# Altium PCB PCB_Rapsi_Hat_V2.PcbDoc
Units mm, origin at the board's own origin, x right, y up, seen from the top; angles counter-clockwise.
Board outline 54 x 54 mm, 2 copper layers (Top Layer, Bottom Layer), stack 1.57 mm thick; 26 components, 23 nets, 124 pads, 6 vias.
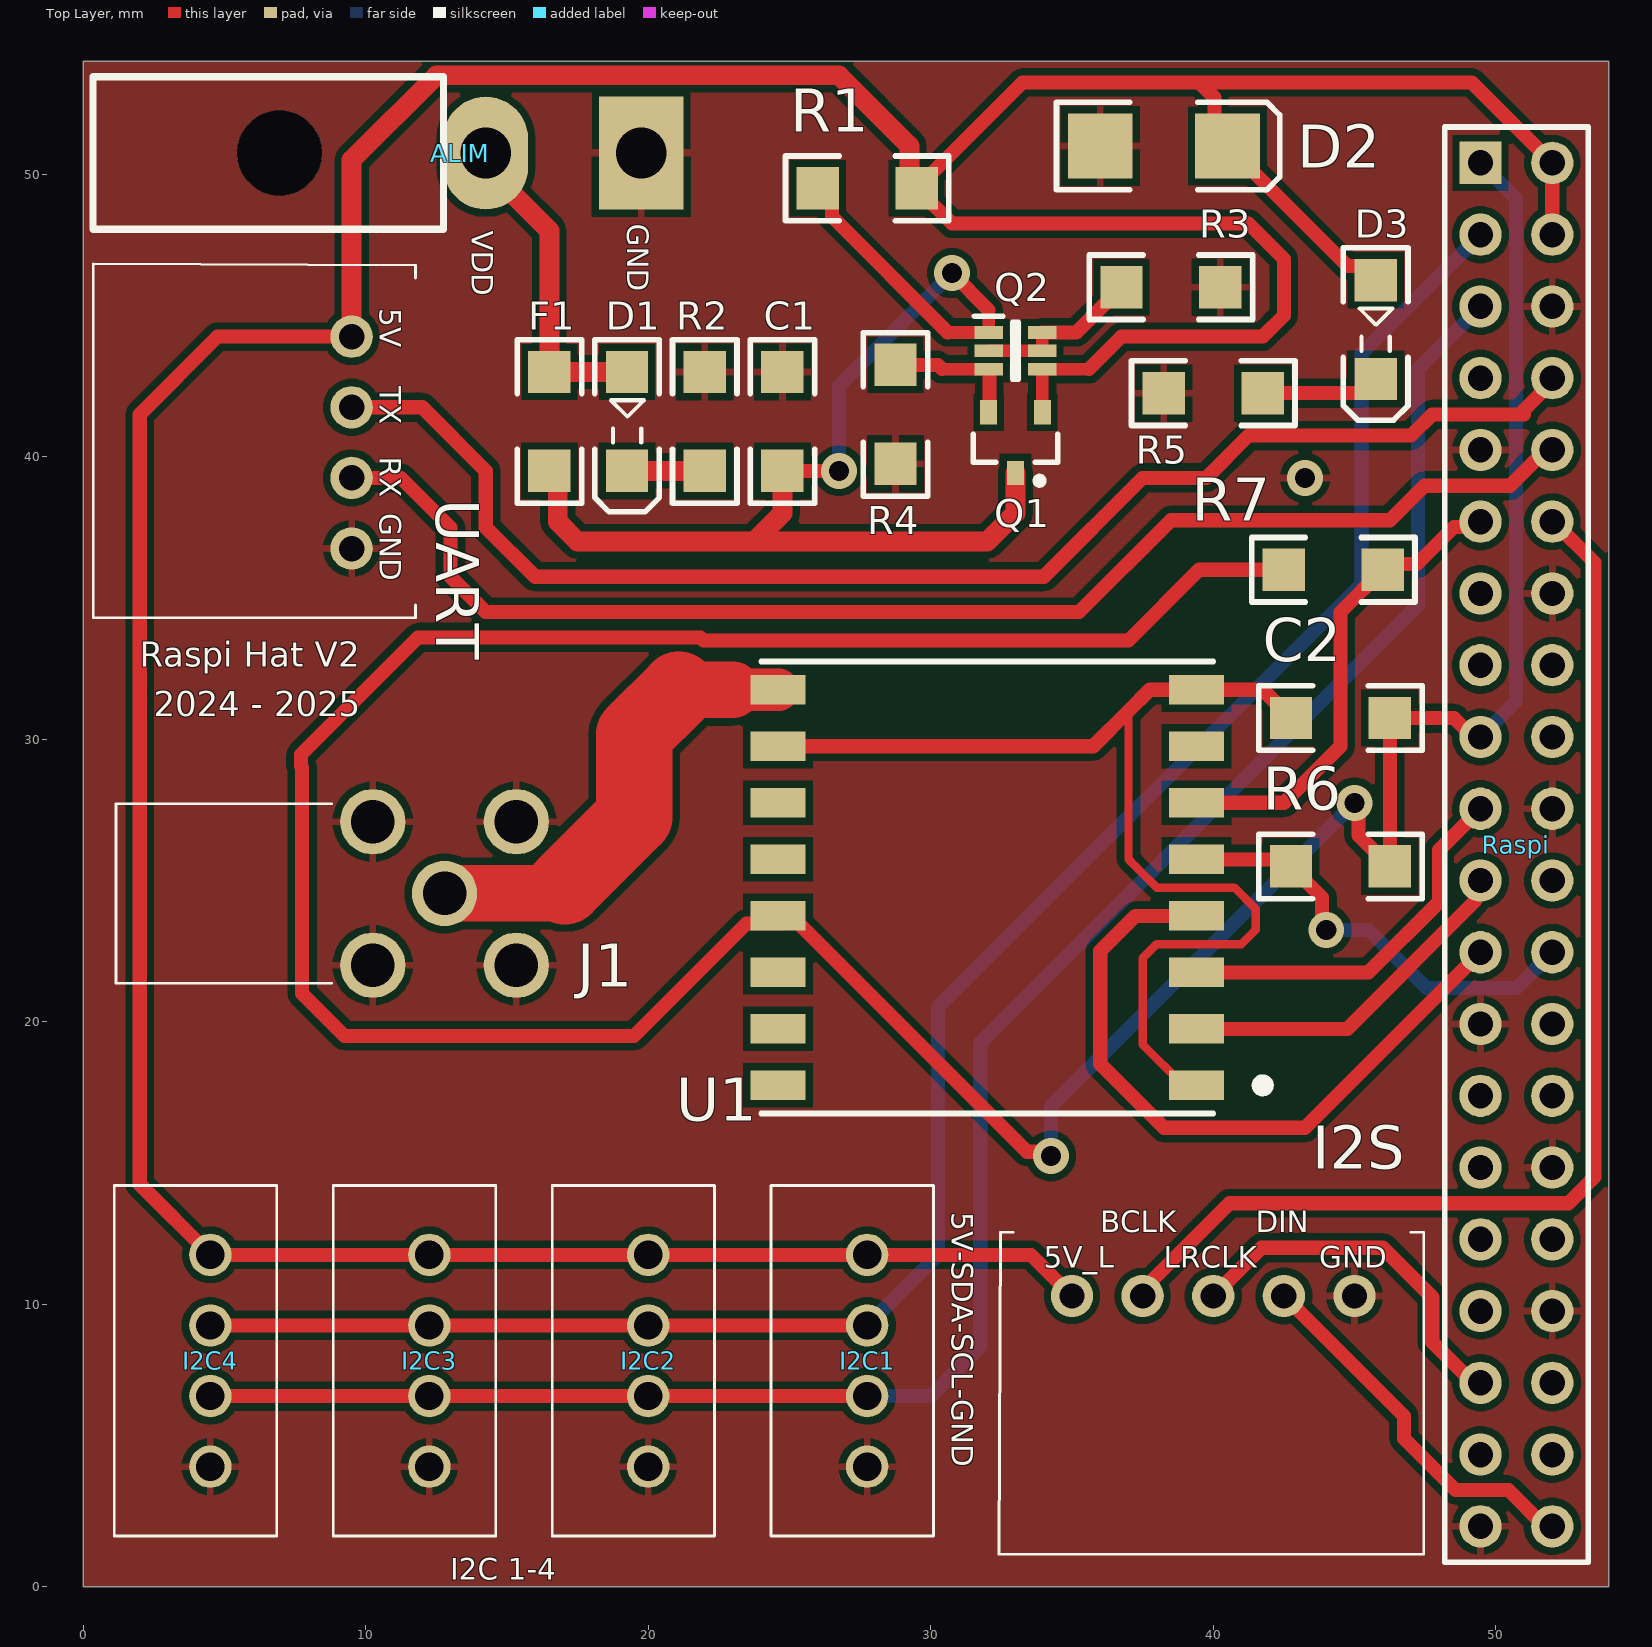
[diagram p0: Top Layer view]
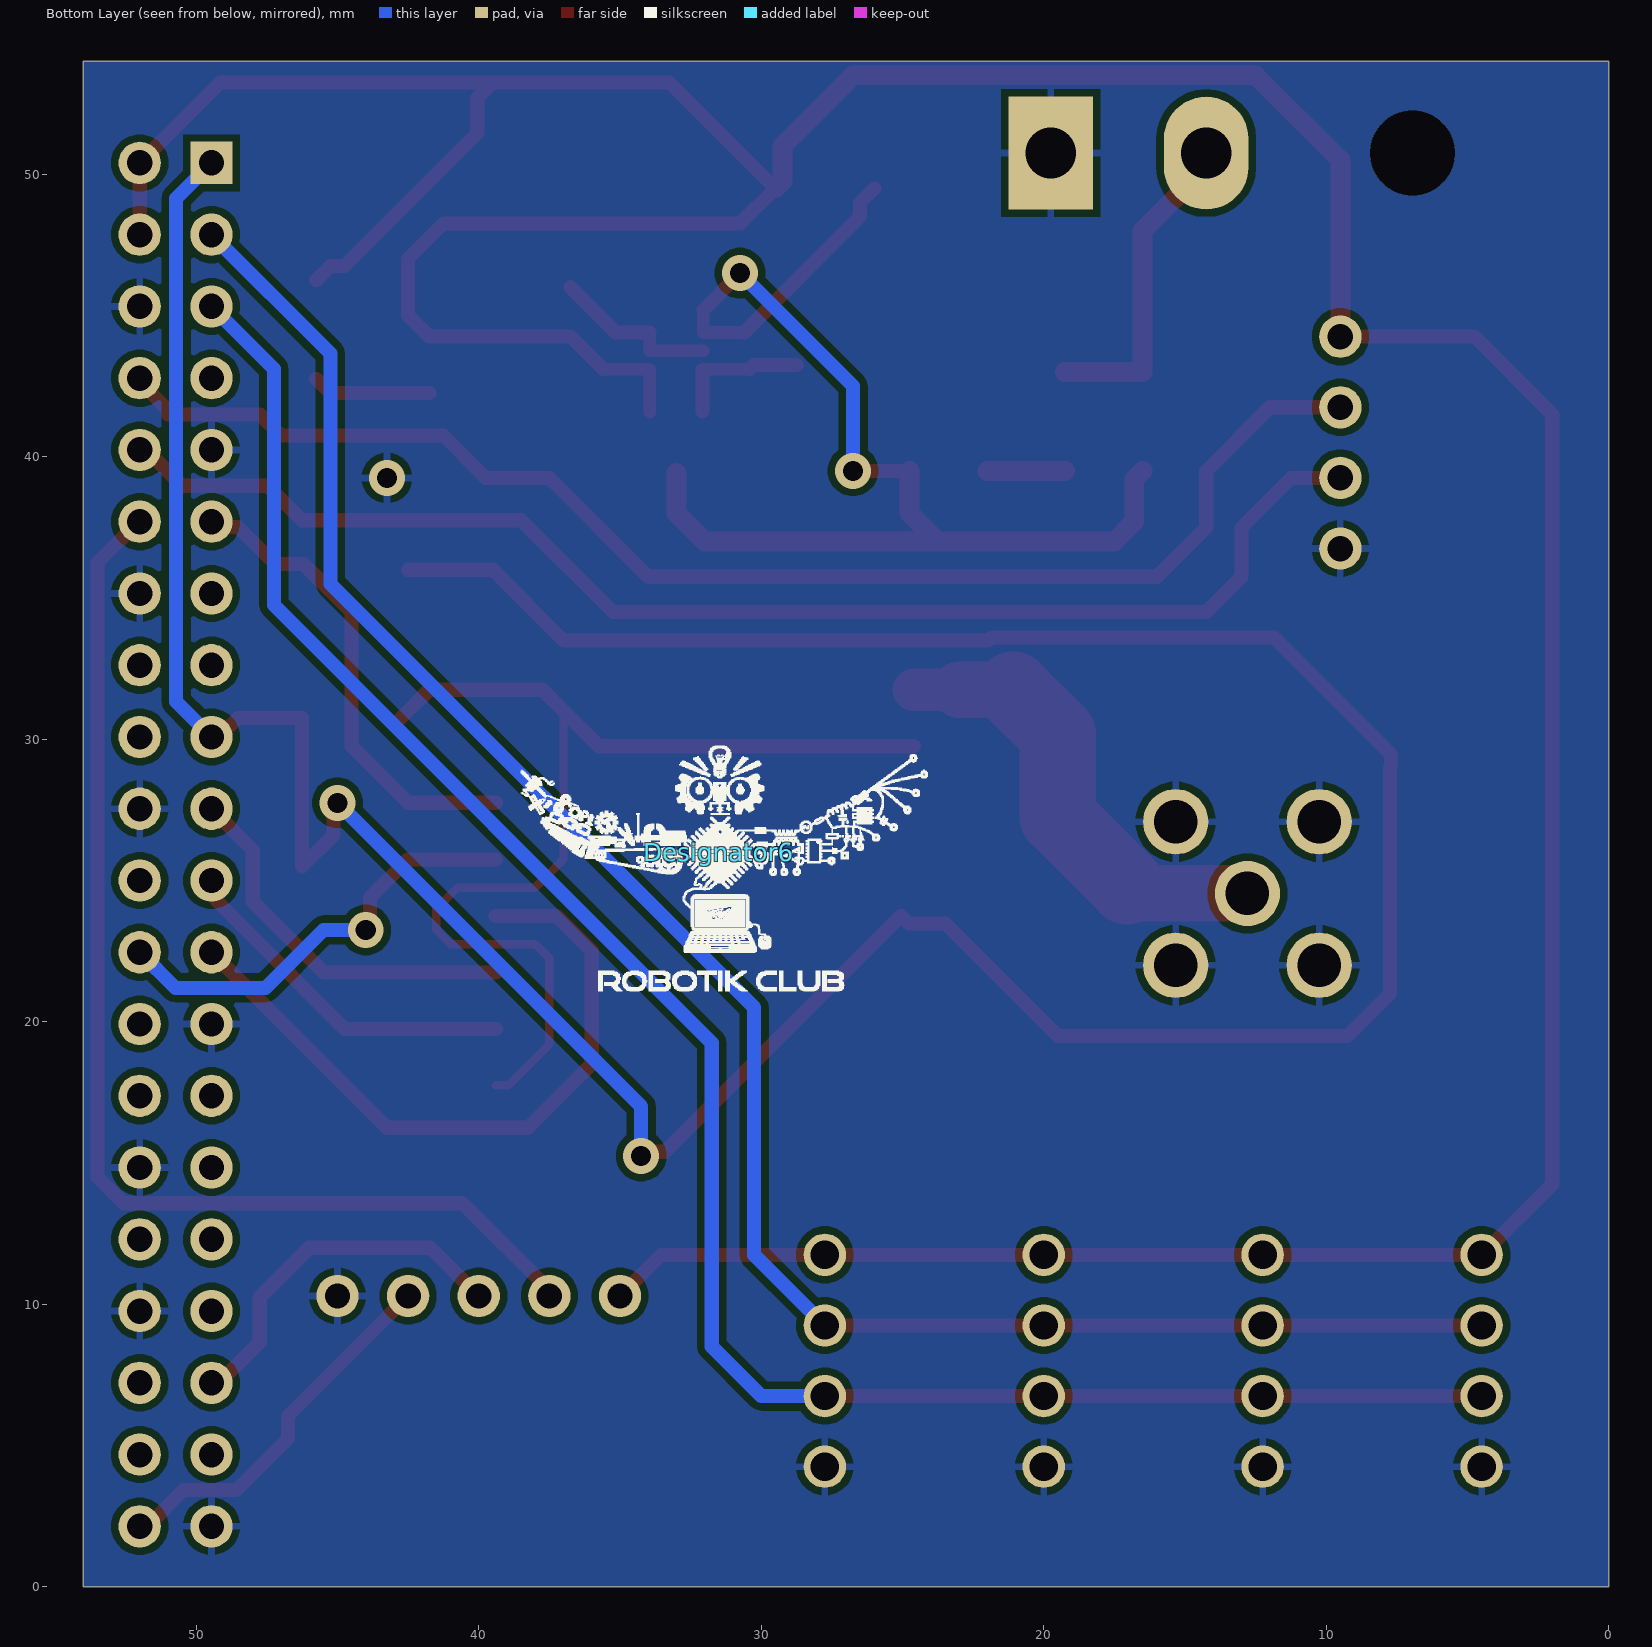
[diagram p1: Bottom Layer view, seen from below]
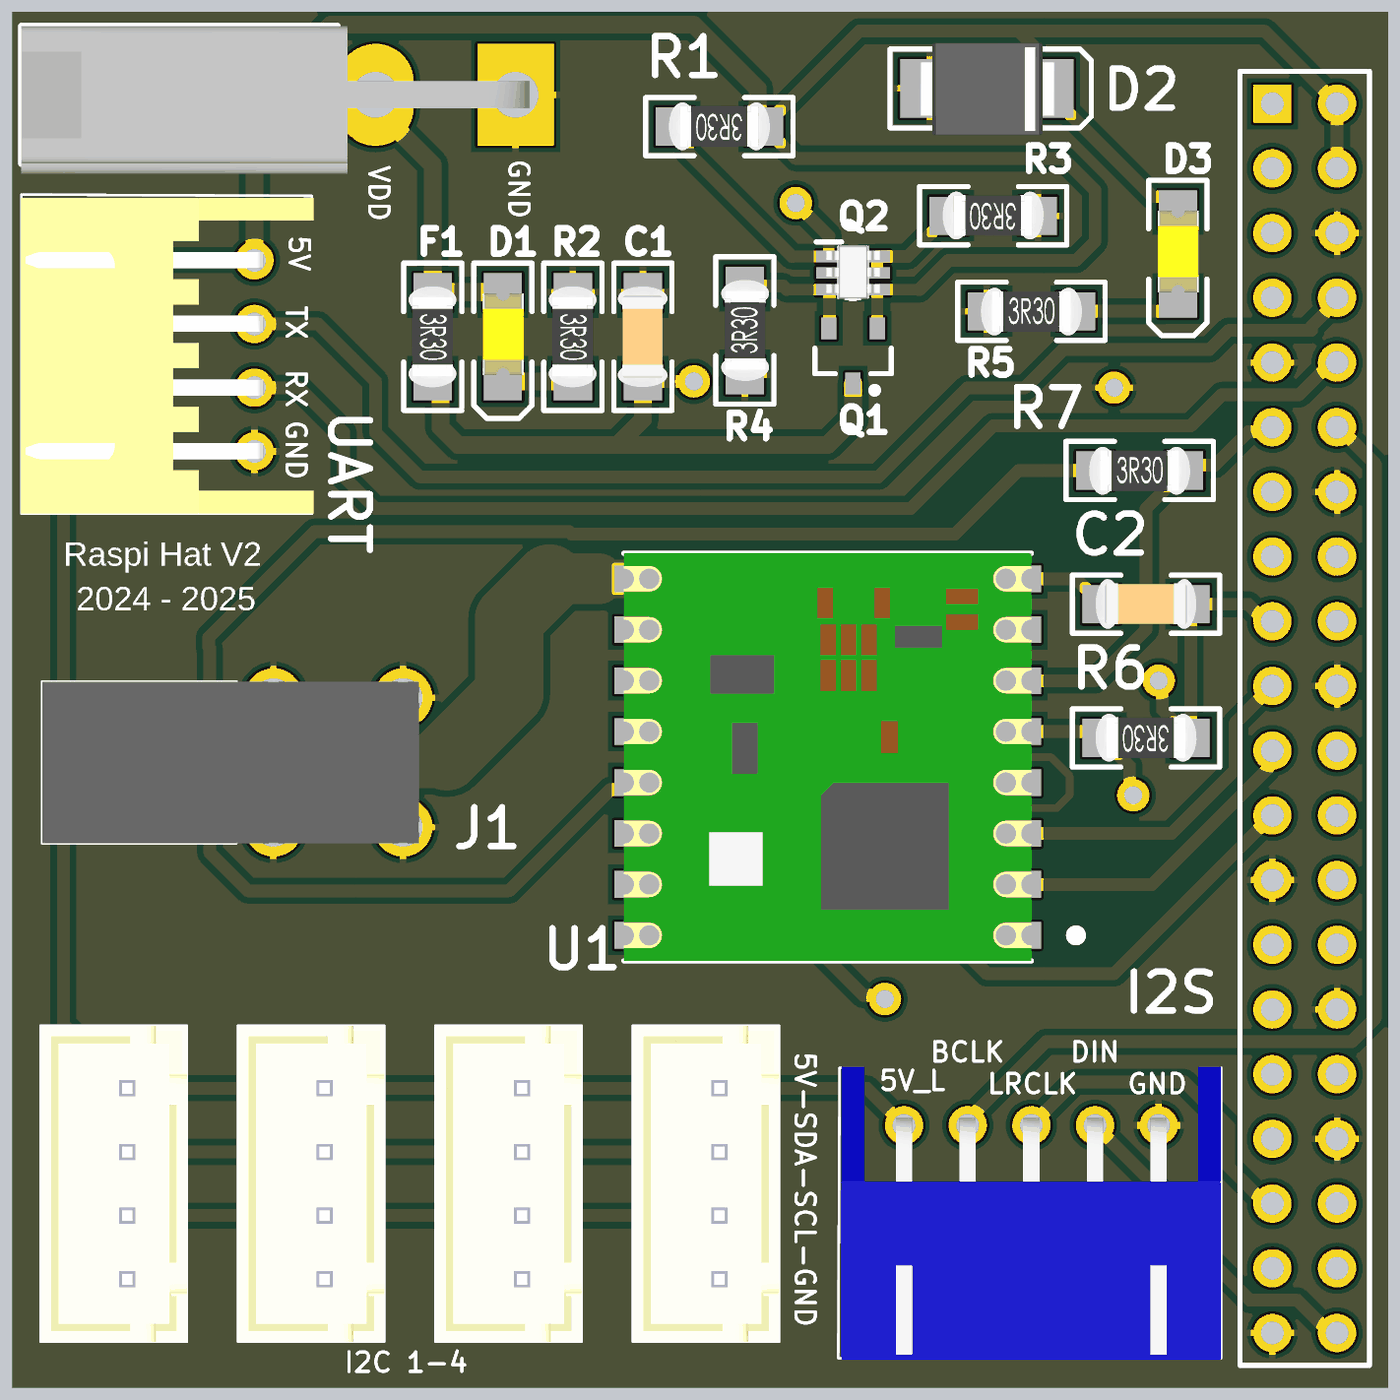
[diagram p2: 3D render of the assembled board from above, using the file's embedded part models]

## Layer stack, top to bottom
Top Solder: solder mask 0.01, Solder Resist, Dk 3.5
Top Layer: signal copper 0.035
Dielectric 1: dielectric 1.5, FR-4, Dk 4.8
Bottom Layer: signal copper 0.035
Bottom Solder: solder mask 0.01, Solder Resist, Dk 3.5

## Board outline
0,0 54,0 54,54 0,54

## Design rules (kind name [scope] priority, off if disabled: settings)
Clearance [All] p1: gap=0.254 ignorepadtopadclearanceinfootprint=FALSE except(0: Arc-Hole Track-Hole SMDPad-Hole THPad-Hole Via-Hole Fill-Hole Poly-Hole Region-Hole Text-Hole)
PlaneClearance [All] p1: clearance=0.258
PolygonConnect [All] p1: connectstyle=Relief reliefconductorwidth=0.254 reliefentries=4 polygonreliefangle="90 Angle" airgapwidth=0.254
RoutingVias [All] p1: holewidth=0.711 width=1.27 viastyle="Through Hole" minholewidth=0.356 minwidth=0.635 maxholewidth=0.711 maxwidth=1.27
SolderMaskExpansion [All] p1: expansion=0.102 istentingtop=FALSE
SupplyNets "Schematic Supply Nets_4" [InNet('5V_IN')] p1: voltage=0.000
SupplyNets "Schematic Supply Nets_3" [InNet('GND')] p2: voltage=0.000
SupplyNets "Schematic Supply Nets_2" [InNet('3V3_L')] p3: voltage=0.000
SupplyNets "Schematic Supply Nets_1" [InNet('5V_L')] p4: voltage=0.000
Width [All] p1: maxlimit=2.8 minlimit=0.254 preferedwidth=0.5 minimp=50.000000 maximp=50.000000 favimp=50.000000
29 further rules are at their usual default settings.

## Components (designator, comment, footprint, x,y, rotation, side; value= is the part's Value field where it differs from the comment)
ALIM "Header 2H" Molex_MiniFitJr_2x1H 14.25,50.75 r180 top
C1 "Cap" "Capacitor 1206" 24.75,41.25 r270 top value=100pF
C2 "Cap" "Capacitor 1206" 44.5,30.75 r180 top value=10µF
D1 "5V_IN" KP-3216SEC 19.25,41.25 r270 top
D2 "SMBJ5.0A" SMB 38.25,51 r90 top
D3 "5V_L" KP-3216SEC 45.75,44.5 r270 top
Designator6 "Comment" Logo_lowres 31.5,26 r180 bottom
F1 "3A" "Resistor 1206" 16.5,41.25 r270 top
I2C1 "Header 4V" B4BXHALFSN 27.75,4.25 r90 top
I2C2 "Header 4V" B4BXHALFSN 20,4.25 r90 top
I2C3 "Header 4V" B4BXHALFSN 12.25,4.25 r90 top
I2C4 "Header 4V" B4BXHALFSN 4.5,4.25 r90 top
I2S "Header 5H" S5B-XH-A 45,10.293 r180 top
J1 "0731000114" 0731000114 12.79,24.54 r0 top
Q1 "DMG2305UX" SOT23_L 33,40.5 r270 top
Q2 "BCM857BS" SOT65P210X110-6N 33,43.75 r0 top
R1 "Res2" "Resistor 1206" 27.75,49.5 r180 top value=0
R2 "Res2" "Resistor 1206" 22,41.25 r270 top value=300
R3 "Res2" "Resistor 1206" 38.5,46 r180 top value=10K
R4 "Res2" "Resistor 1206" 28.75,41.5 r90 top value=47K
R5 "Res2" "Resistor 1206" 40,42.25 r0 top value=300
R6 "Res2" "Resistor 1206" 44.5,25.5 r180 top value=10K
R7 "Res2" "Resistor 1206" 44.25,36 r0 top value=10K
Raspi "Header 20X2" HDR2X20 49.46,50.4 r270 top
U1 "RFM95W-868S2" XCVR_RFM95W-868S2 32,24.75 r180 top
UART "Header 4H" S4B-XH-A 9.5,36.75 r90 top

## Footprints (in the part's own frame and the unit in brackets; to place one, negate y for a bottom-side part, rotate by r counter-clockwise, add the part's x,y. Pads: shape width x height; smd on the part's side, far side on the other; paste and mask are expansions set on the pad)
0731000114 [mm]
  round 2.31 hole 1.54: 1(0,0) 2(2.54,2.54) 3(-2.54,2.54) 4(-2.54,-2.54) 5(2.54,-2.54)
  silkscreen extent -11.63,-3.17 -4,3.17, body extent -11.63,-3.21 3.21,3.21, height 9.67
B4BXHALFSN [mm]
  round 1.5 hole 1: 1(0,0) 2(2.5,0) 3(5,0) 4(7.5,0)
  silkscreen extent -2.45,-2.35 9.95,3.4, body extent -2.45,-2.35 9.95,3.4, height 7.52
"Capacitor 1206" [mm]
  rect 1.5x1.5 smd: 1(-1.75,0) 2(1.75,0)
  silkscreen extent -2.89,-1.14 2.89,1.14, body extent -1.98,-0.99 1.98,0.96, height 1.3
HDR2X20 [mm] "Connector; Header; 20x2 Position"
  rect 1.5x1.5 hole 0.9: 1(0,0)
  round 1.5 hole 0.9: 2(0,2.54) 3(2.54,0) 4(2.54,2.54) 5(5.08,0) 6(5.08,2.54) 7(7.62,0) 8(7.62,2.54) 9(10.16,0) 10(10.16,2.54) 11(12.7,0) 12(12.7,2.54) 13(15.24,0) 14(15.24,2.54) 15(17.78,0) 16(17.78,2.54) 17(20.32,0) 18(20.32,2.54) 19(22.86,0) 20(22.86,2.54) 21(25.4,0) 22(25.4,2.54) 23(27.94,0) 24(27.94,2.54) 25(30.48,0) 26(30.48,2.54) 27(33.02,0) 28(33.02,2.54) 29(35.56,0) 30(35.56,2.54) 31(38.1,0) 32(38.1,2.54) 33(40.64,0) 34(40.64,2.54) 35(43.18,0) 36(43.18,2.54) 37(45.72,0) 38(45.72,2.54) 39(48.26,0) 40(48.26,2.54)
  silkscreen extent -1.27,-1.27 49.53,3.81
KP-3216SEC [mm]
  rect 1.5x1.5 smd: 1(-1.75,0) 2(1.75,0)
  silkscreen extent -2.89,-1.14 3.2,1.14, body extent -1.7,-0.79 1.5,0.81, height 1.1
Logo_lowres [mm]
  silkscreen extent -7.01,-4.93 7.39,3.76
Molex_MiniFitJr_2x1H [mm] "Connecteur Molex 2"
  rect 3x4 hole 1.8: 1(-5.5,0)
  oval 3x4 hole 1.8: 2(0,0)
  round 3 hole 3 unplated: 3(7.3,0)
  silkscreen extent 1.5,-2.7 13.9,2.7, body extent -6.03,-2.7 13.9,3.1, height 11.01
"Resistor 1206" [mm]
  rect 1.5x1.5 smd: 1(-1.75,0) 2(1.75,0)
  silkscreen extent -2.89,-1.14 2.89,1.14, body extent -1.98,-0.95 1.98,0.93, height 0.55
S4B-XH-A [mm]
  round 1.5 hole 0.9: 1(0,0) 2(2.5,0) 3(5,0) 4(7.5,0)
  silkscreen extent -2.45,-2.26 10.08,9.14, body extent -2.44,-2.32 9.96,9.18, height 6.15
S5B-XH-A [mm]
  round 1.5 hole 0.9: 1(0,0) 2(2.5,0) 3(5,0) 4(7.5,0) 5(10,0)
  silkscreen extent -2.45,-2.26 12.58,9.14, body extent -2.45,-2.3 12.45,9.2, height 6.15
SMB [mm] "SMB Didoe"
  rect 2.3x2.3 smd: 1(0,2.25) 2(0,-2.25)
  silkscreen extent -1.55,-4.1 1.55,3.8, body extent -1.84,-2.67 1.78,2.62, height 2.2
SOT23_L [mm] "SOT23, 3-Leads, Body 2.9x1.3mm, Pitch 0.95mm, Lead Span 2.3mm - Reverse Pinning, IPC High Density"
  rect 0.85x0.6 smd: 1(1.075,0) 2(-1.075,-0.95) 3(-1.075,0.95)
  silkscreen extent -0.3,-1.5 1.47,1.5, body extent -0.7,-1.5 0.7,1.5, height 1.1
SOT65P210X110-6N [mm]
  rect 1x0.45 smd: 1(-0.95,0.65) 2(-0.95,0) 3(-0.95,-0.65) 4(0.95,-0.65) 5(0.95,0) 6(0.95,0.65)
  silkscreen extent -1.45,-1 0.1,1.22, body extent -1.05,-1.06 1.05,1.09, height 0.95
XCVR_RFM95W-868S2 [mm]
  rect 1.95x1.05 smd: 1(-7.4,7) 2(-7.4,5) 3(-7.4,3) 4(-7.4,1) 5(-7.4,-1) 6(-7.4,-3) 7(-7.4,-5) 8(-7.4,-7) 9(7.4,-7) 10(7.4,-5) 11(7.4,-3) 12(7.4,-1) 13(7.4,1) 14(7.4,3) 15(7.4,5) 16(7.4,7)
  silkscreen extent -10.04,-8 8,8, body extent -8,-8 8,8, height 1.8

## Part data
ALIM: "Header, 2-Pin, Right Angle", LatestRevisionDate=17-Jul-2002, LatestRevisionNote="Re-released for DXP Platform.", Publisher="Altium Limited"
C1 C2: "Capacitor", LatestRevisionDate=17-Jul-2002, LatestRevisionNote="Re-released for DXP Platform.", PackageDescription="Radial Cap, Thru-Hole; 2 Leads; 0.3 in Pin Spacing", PackageReference=RAD-0.3, Published=8-Jun-2000, Publisher="Altium Limited"
D1 D3: library part LED2, "Typical RED, GREEN, YELLOW, AMBER GaAs LED", LatestRevisionDate=17-Jul-2002, LatestRevisionNote="Re-released for DXP Platform.", PackageDescription="SM LED; 2 Flat Leads", PackageReference=3.2X1.6X1.1, PackageVersion=Feb-2002, Published=8-Jun-2000, Publisher="Altium Limited"
D2: library part "D Zener", "Zener Diode", LatestRevisionDate=17-Jul-2002, LatestRevisionNote="Re-released for DXP Platform.", PackageDescription="Diode, Thru-Hole; 2 Leads; 0.7 in Pin Spacing", PackageReference=DIODE-0.7, Published=8-Jun-2000, Publisher="Altium Limited"
F1: library part "Fuse 2", "Fuse", LatestRevisionDate=17-Jul-2002, LatestRevisionNote="Re-released for DXP Platform.", PackageDescription="Thru-Hole; 2 Leads", PackageReference=PIN-W2/E2.8, Published=8-Jun-2000, Publisher="Altium Limited"
I2C1 I2C2 I2C3 I2C4: library part "Header 4H", "Header, 4-Pin, Right Angle", LatestRevisionDate=17-Jul-2002, LatestRevisionNote="Re-released for DXP Platform.", Publisher="Altium Limited"
I2S: "Header, 5-Pin, Right Angle", LatestRevisionDate=17-Jul-2002, LatestRevisionNote="Re-released for DXP Platform.", Publisher="Altium Limited"
J1: "Connector", Manufacturer_Name=Molex, Mouser Part Number=N/A, Arrow Part Number=0731000114, Arrow Price/Stock=https://www.arrow.com/en/products/0731000114/molex?region=europe, Datasheet Link=https://www.molex.com/pdm_docs/sd/731000114_sd.pdf, Height=9.57mm, Manufacturer_Part_Number=0731000114, Mouser Price/Stock=https://www.mouser.co.uk/ProductDetail/Molex/0731000114?qs=PBcRNPEHKspjQWXqYv3LPw%3D%3D
Q1: library part MOSFET-P, "P-Channel MOSFET", LatestRevisionDate=17-Jul-2002, LatestRevisionNote="Re-released for DXP Platform.", PackageDescription="TO, Flat Index; 3 In-Line, Axial Leads; Body Dia. 4.6mm; Lead Dia. 0.5 mm (max)", PackageReference=E3, PackageVersion=1995/1996, Published=8-Jun-2000, Publisher="Altium Limited"
Q2: "Transistor", Manufacturer_Name=Nexperia, Mouser Part Number=N/A, Datasheet Link=https://assets.nexperia.com/documents/data-sheet/BCM857BV_BS_DS.pdf, Height=1.1mm, Manufacturer_Part_Number=BCM857BS, Mouser Price/Stock=https://www.mouser.com/Search/Refine.aspx?Keyword=N%2FA
R1 R2 R3 R4 R5 R6 R7: "Resistor", LatestRevisionDate=17-Jul-2002, LatestRevisionNote="Re-released for DXP Platform.", PackageDescription="Axial Device, Thru-Hole; 2 Leads; 0.4 in Pin Spacing", PackageReference=AXIAL-0.4, Published=8-Jun-2000, Publisher="Altium Limited"
Raspi: "Header, 20-Pin, Dual row", LatestRevisionDate=17-Jul-2002, LatestRevisionNote="Re-released for DXP Platform.", Publisher="Altium Limited"
U1: "General ISM < 1GHz LoRaâ„¢ Transceiver Module 868MHz Antenna Not Included Surface Mount", Package="Non Standard RF Solutions", Availability="In Stock", Check_prices=https://www.snapeda.com/parts/RFM95W-868S2/RF+Solutions/view-part/?ref=eda, MF=RF, MP=RFM95W-868S2, Price=None, Purchase-URL=https://pricing.snapeda.com/search?q=RFM95W-868S2&ref=eda, SnapEDA_Link=https://www.snapeda.com/parts/RFM95W-868S2/RF+Solutions/view-part/?ref=snap
UART: "Header, 4-Pin, Right Angle", LatestRevisionDate=17-Jul-2002, LatestRevisionNote="Re-released for DXP Platform.", Publisher="Altium Limited"

## Via types
v1: diameter 1.27, hole 0.711, Top Layer to Bottom Layer, 6 vias

## Nets (pads, with @x,y where several pads share a name; then routed paths per layer and width w, separated by ;. In a path a pad name is that pad's centre, name@x,y a point inside that pad or via, vN(x,y) a via of type N, cw(c..) or ccw(c..) an arc to the next point about the centre after c; other vN are vias at no path point)
3V3_L: C2.1 R6.1 R7.1 Raspi.1 Raspi.17 U1.13 | length 128.3
  Top Layer w0.5: v1(34.25,15.25) 34.103,15.397 33.403,15.397 25.05,23.75 24.775,23.475 23.475,23.475 19.5,19.5 9.25,19.5 7.75,21 7.75,29 7.707,29.043 7.707,29.457 11.854,33.604 21.85,33.604 21.954,33.5 37,33.5 39.5,36 R7.1 ; v1(45,27.75) 45.147,27.603 45.147,26.603 R6.1 C2.1 48.519,30.75 49.189,30.08 Raspi.17
  Bottom Layer w0.5: v1(34.25,15.25) 34.25,17 v1(45,27.75) ; Raspi.17 50.714,31.334 50.714,49.146 Raspi.1
5V_IN: ALIM.2 D1.1 F1.1 | length 11.4
  Top Layer w0.7: ALIM.2 14.25,50.25 16.5,48 F1.1 D1.1
5V_L: D2.2 D3.1 I2C1.4 I2C2.4 I2C3.4 I2C4.4 I2S.5 Q1.3 Q2.4 R1.1 Raspi.2 Raspi.4 UART.4 | length 165
  Top Layer w0.45: Q1.3 Q2.4 35.6,43.1
  Top Layer w0.5: UART.4 4.75,44.25 2,41.5 2,14.25 I2C4.4 I2C3.4 I2C2.4 I2C1.4 33.543,11.75 I2S.5 ; 35.6,43.1 36.75,44.25 41.75,44.25 42.5,45 42.5,47 41.25,48.25 30.75,48.25 R1.1 33.25,53.25 39.5,53.25 ; D3.1 45.25,46.75 44.75,46.75 D2.2 40.043,51.457 40.043,52.707 39.5,53.25 ; Raspi.4 Raspi.2 49.15,53.25 39.5,53.25
  Top Layer w0.7: UART.4 9.5,50.5 12.5,53.5 26.75,53.5 29.25,51 29.25,49.75 R1.1
GND: ALIM.1 C1.1 D2.1 I2C1.1 I2C2.1 I2C3.1 I2C4.1 I2S.1 J1.2 J1.3 J1.4 J1.5 R2.1 R3.1 R4.1 R5.1 Raspi.6 Raspi.9 Raspi.14 Raspi.20 Raspi.25 Raspi.30 Raspi.34 Raspi.39 UART.1
  other v1: 43.25,39.25
NetC1_2: C1.2 F1.2 Q1.1 Q2.1 R1.2 | length 44.9
  Top Layer w0.45: 30.6,44.4 Q2.1 32.05,45.2
  Top Layer w0.5: C1.2 v1(26.75,39.5) ; R1.2 26.5,49 26.5,48.5 30.6,44.4 ; v1(30.75,46.5) 32.05,45.2
  Top Layer w0.7: F1.2 16.8,39.2 16.8,37.7 17.5,37 23.75,37 ; C1.2 24.75,38 23.75,37 ; Q1.1 33,38 32,37 23.75,37
  Bottom Layer w0.5: v1(26.75,39.5) 26.75,42.5 v1(30.75,46.5)
NetC2_2: C2.2 U1.1 U1.8 U1.10 | length 40.6
  Top Layer w0.3: 37,31 37,25.75 37.25,25.5 38,24.75 40.75,24.75 41.5,24 41.5,23.25 41,22.75 38,22.75 37.5,22.25 37.5,19.2 38.95,17.75 U1.1
  Top Layer w0.5: U1.10 35.75,29.75 37,31 37.75,31.75 U1.8 41.75,31.75 C2.2
NetD1_2: D1.2 R2.2 | length 2.7
  Top Layer w0.7: D1.2 R2.2
NetD3_2: D3.2 R5.2 | length 4.2
  Top Layer w0.5: R5.2 45.25,42.25 D3.2
NetJ1_1: J1.1 U1.9 | length 16.4
  Top Layer w1.5: 23,31.75 U1.9
  Top Layer w2: J1.1 17,24.54 ; 21.082,31.75 23,31.75
  Top Layer w2.7: 17.04,24.79 19.5,27.25 19.5,30.168 21.082,31.75
NetQ1_2: Q1.2 Q2.3 R4.2 | length 4.8
  Top Layer w0.45: 30.4,43.1 Q2.3
  Top Layer w0.5: R4.2 30.25,43.25 30.4,43.1 ; Q1.2@32.075,41.6 Q2.3@32.075,43.075
NetQ2_2: Q2.2 Q2.5 Q2.6 R3.2 | length 6
  Top Layer w0.45: Q2.2 Q2.5 Q2.6
  Top Layer w0.5: Q2.6 35.15,44.4 R3.2
SPI0_CE0: R6.2 Raspi.24 U1.5 | length 15.6
  Top Layer w0.5: U1.5 42.5,25.75 R6.2 43.853,24.397 43.853,23.397 v1(44,23.25)
  Bottom Layer w0.5: v1(44,23.25) 45.5,23.25 47.55,21.2 50.74,21.2 Raspi.24
SPI0_MISO: Raspi.21 U1.2 | length 12.6
  Top Layer w0.5: U1.2 44.75,19.75 49.269,24.269 49.269,24.809 Raspi.21
SPI0_MOSI: Raspi.19 U1.3 | length 13.5
  Top Layer w0.5: U1.3 45.5,21.75 48,24.25 48,26.08 Raspi.19
SPI0_SCLK: Raspi.23 U1.4 | length 24.9
  Top Layer w0.5: U1.4 37.25,23.75 36,22.5 36,18.5 38.25,16.25 43.25,16.25 Raspi.23
T_GPIO_17: R7.2 Raspi.11 U1.6 | length 17
  Top Layer w0.5: U1.6 42.5,27.75 44.5,29.75 44.5,34.5 R7.2 46.207,36.207 47.207,36.207 48.519,37.519 49.279,37.519 Raspi.11
T_GPIO_18: I2S.4 Raspi.12 | length 41.7
  Top Layer w0.5: I2S.4 37.5,10.5 40.575,13.575 52.575,13.575 53.5,14.5 53.5,36.25 52.05,37.7 Raspi.12
T_GPIO_19: I2S.3 Raspi.35 | length 13.1
  Top Layer w0.5: I2S.3 41.707,12 46,12 47.75,10.25 47.75,8.659 49.189,7.22 Raspi.35
T_GPIO_21: I2S.2 Raspi.40 | length 13.3
  Top Layer w0.5: I2S.2 46.75,6.043 46.75,5.25 48.575,3.425 50.444,3.425 51.729,2.14 Raspi.40
T_I2C_SCL: I2C1.2 I2C2.2 I2C3.2 I2C4.2 Raspi.5 | length 72.1
  Top Layer w0.5: I2C4.2 I2C3.2 I2C2.2 I2C1.2
  Bottom Layer w0.5: I2C1.2 30,6.75 31.75,8.5 31.75,19.25 47.25,34.75 47.25,43.11 Raspi.5
T_I2C_SDA: I2C1.3 I2C2.3 I2C3.3 I2C4.3 Raspi.3 | length 70.9
  Top Layer w0.5: I2C4.3 I2C3.3 I2C2.3 I2C1.3
  Bottom Layer w0.5: I2C1.3 30.25,11.75 30.25,20.5 45.25,35.5 45.25,43.65 Raspi.3
T_UART_RX: Raspi.10 UART.2 | length 47.9
  Top Layer w0.5: UART.2 11.25,39.25 13,37.5 13,35.75 14.25,34.5 35.25,34.5 38.5,37.75 46.25,37.75 47.475,38.975 50.506,38.975 51.771,40.24 Raspi.10
T_UART_TX: Raspi.8 UART.3 | length 49.2
  Top Layer w0.5: UART.3 12,41.75 14.25,39.5 14.25,37.5 16,35.75 34,35.75 37.5,39.25 39.75,39.25 41.25,40.75 47,40.75 47.75,41.5 51,41.5 51,41.659 52,42.659 Raspi.8
pads on no net: ALIM.3 Raspi.7 Raspi.13 Raspi.15 Raspi.16 Raspi.18 Raspi.22 Raspi.26 Raspi.27 Raspi.28 Raspi.29 Raspi.31 Raspi.32 Raspi.33 Raspi.36 Raspi.37 Raspi.38 U1.7 U1.11 U1.12 U1.14 U1.15 U1.16

## Polygon pours and split planes (outlines as drawn)
GND on Bottom Layer "GND_L02_P002" (solid, pour order 2): 0,0 54,0 54,54 0,54
GND on Top Layer "gnd_top" (solid, remove dead copper, pour order 1): 0,0 54,0 54,54 0,54

## Silkscreen, mask and mechanical layers (free items; w line width, h text height)
Top Overlay:
  text "GND" at 19.25,48.25 h0.76 r270
  text "VDD" at 13.75,48 h0.76 r270
  text "5V" at 10.5,45.25 h0.76 r270
  text "TX" at 10.5,42.5 h0.76 r270
  text "RX" at 10.5,40 h0.76 r270
  text "GND" at 10.5,38 h0.76 r270
  text "Raspi Hat V2" at 2,32.266 h1.5
  text "2024 - 2025" at 2.499,30.517 h1.5
  text "5V-SDA-SCL-GND" at 30.75,13.25 h0.76 r270
  text "BCLK" at 36,12.543 h0.76
  text "DIN" at 41.5,12.543 h0.76
  text "5V_L" at 34,11.293 h0.76
  text "LRCLK" at 38.25,11.293 h0.76
  text "GND" at 43.75,11.293 h0.76
  text "I2C 1-4" at 13,0.25 h0.76
Mechanical 1:
  the board outline again, w0.254